# Altium PCB PCB_ECG_Amplifier.pcbdoc
Units mil, origin at the board's own origin, x right, y up, seen from the top; angles counter-clockwise.
Board outline 3315 x 2670 mil, 2 copper layers (Top Layer, Bottom Layer); 32 components, 27 nets, 96 pads, 21 vias.
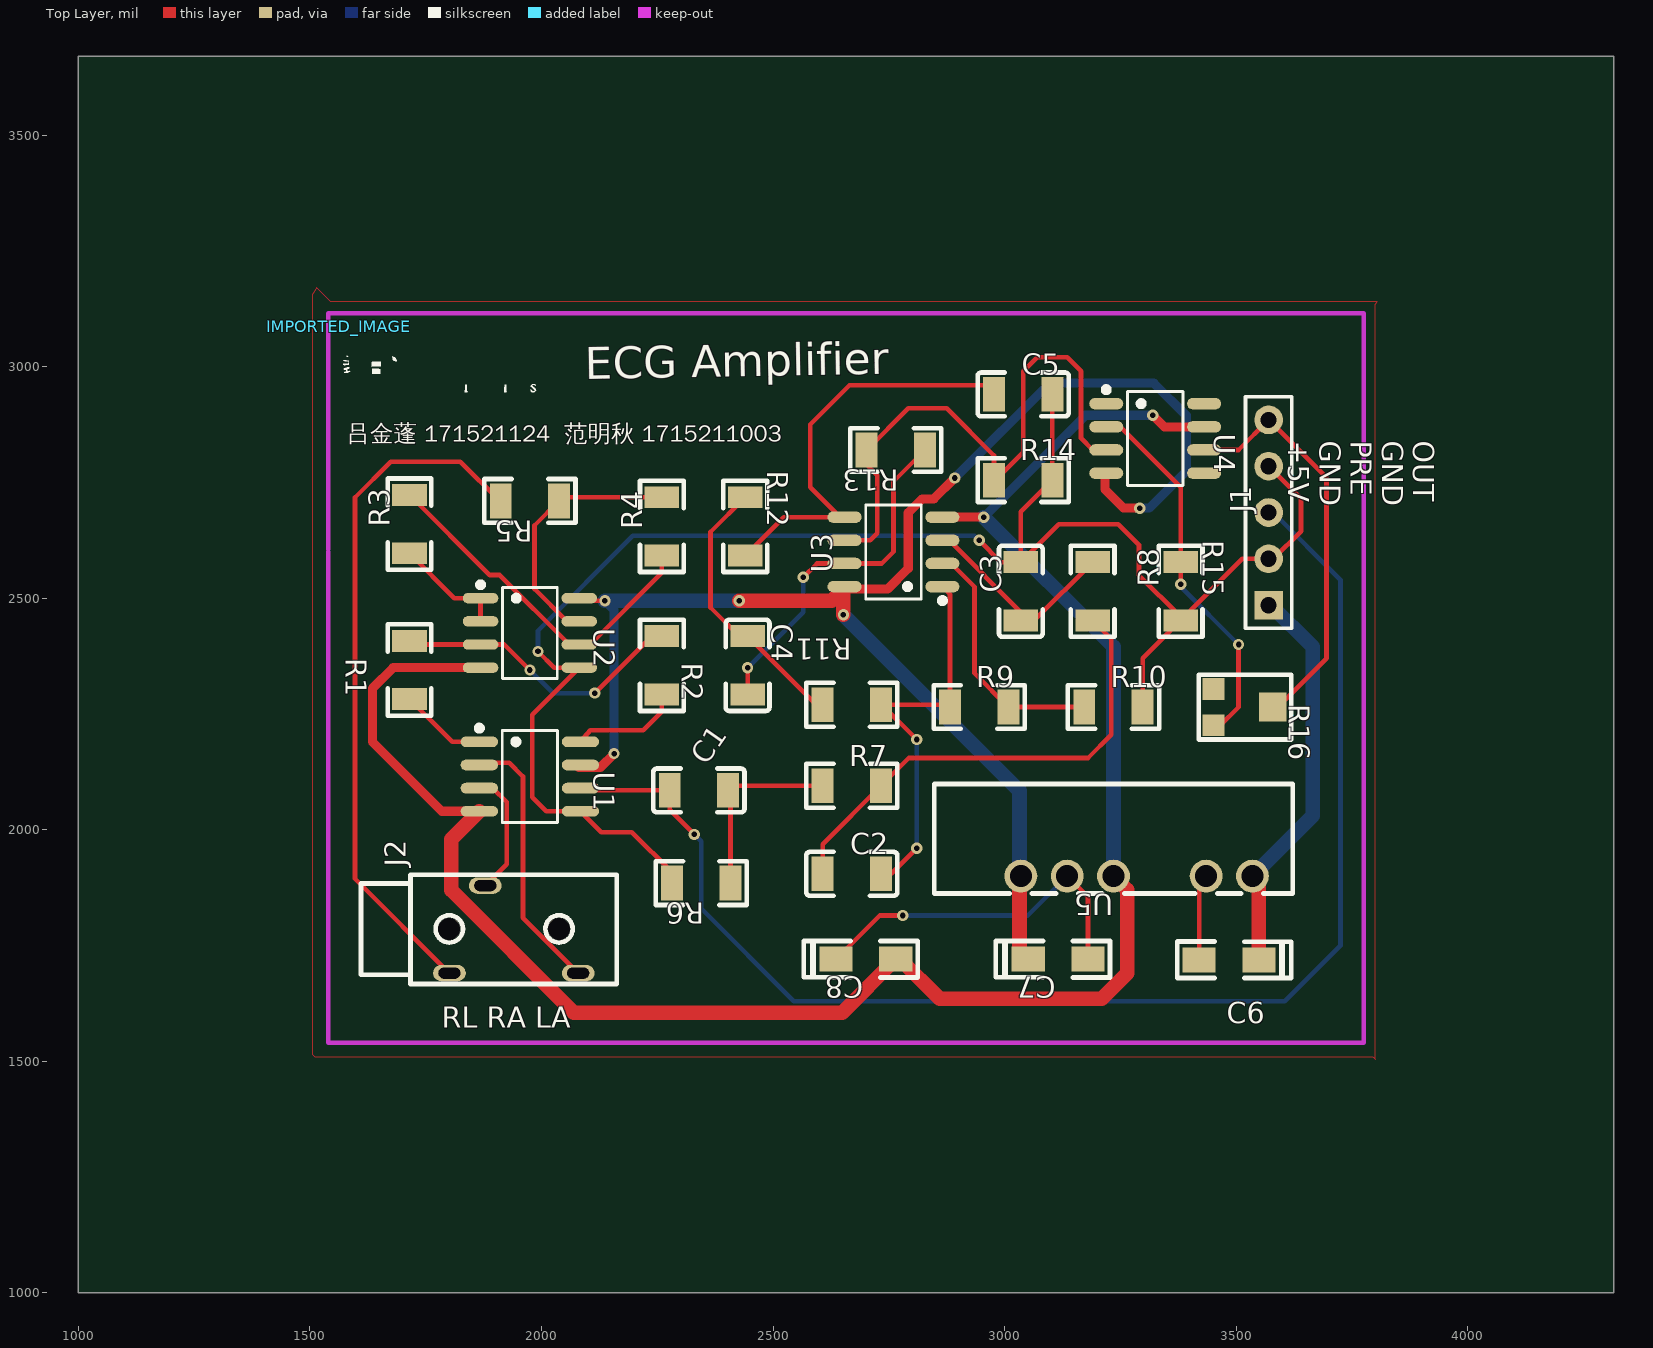
[diagram p0: Top Layer view]
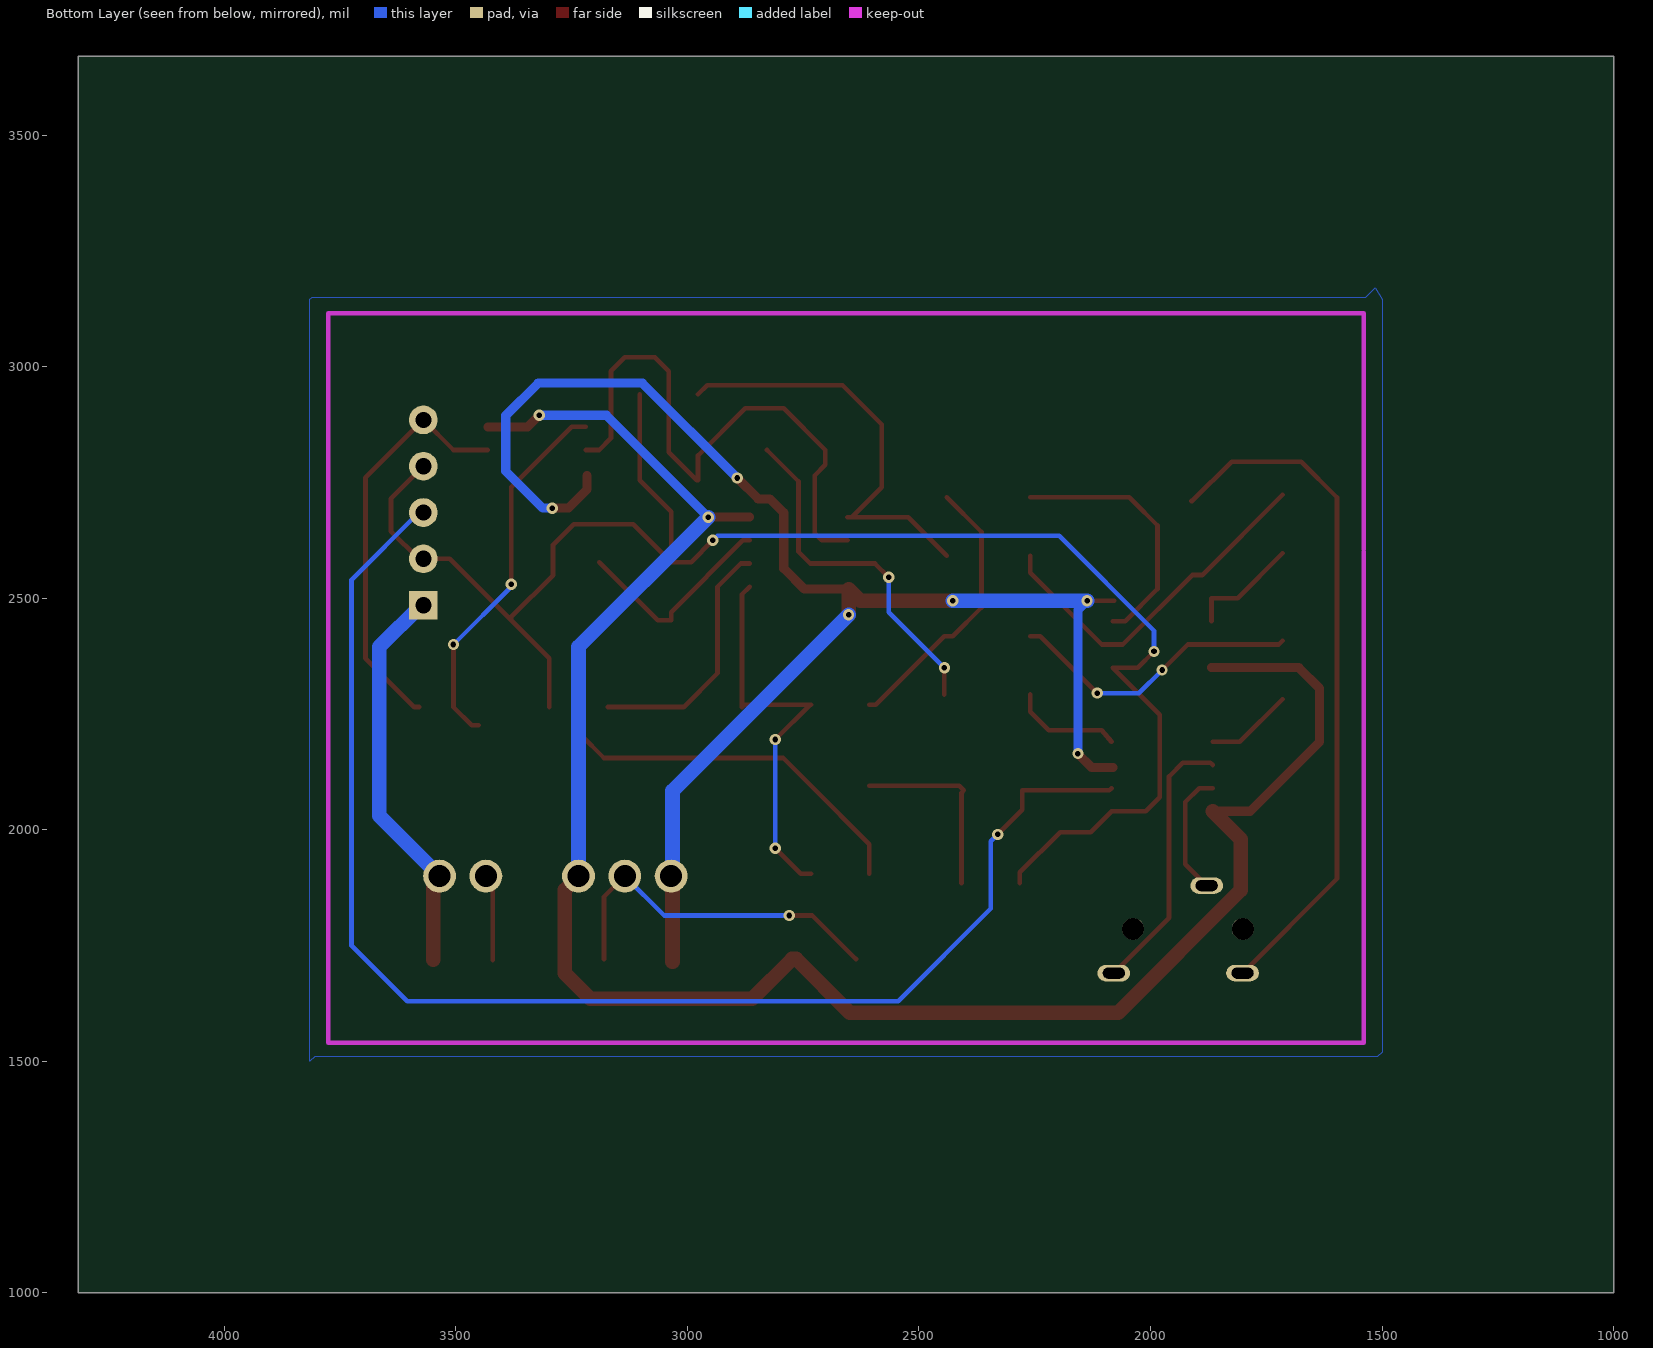
[diagram p1: Bottom Layer view, seen from below]

## Layer stack, top to bottom
Top Layer: signal copper (thickness not stored)
Dielectric: dielectric 12.6, FR-4, Dk 4.8
Bottom Layer: signal copper (thickness not stored)

## Board outline
4315,1000 1000,1000 1000,3670 4315,3670

## Components (designator, comment, footprint, x,y, rotation, side; value= is the part's Value field where it differs from the comment)
C1 "1u" C1206 2340,2085 r0 top
C2 "1u" C1206 2670,1905 r0 top
C3 "1u" C1206 3035,2515 r90 top
C4 "1u" C1206 2445,2355 r270 top
C5 "1u" C1206 3040,2940 r0 top
C6 "4.7u" CASE-A_3216 3480,1720 r0 top
C7 "1u" CASE-A_3216 3120,1720 r180 top
C8 "1u" CASE-A_3216 2705,1720 r180 top
IMPORTED_IMAGE "IMPORTED_IMAGE" IMPORTED_IMAGE 1562.31,3086.02 r0 top
J1 "HDR-M-2.54_1x5" HDR-M-2.54_1X5 3570,2685 r90 top
J2 "Black headphone jack" AUDIO-PJ320 1940,1785 r90 top
R1 "1k" R1206 1715,2345 r270 top
R2 "1k" R1206 2260,2355 r270 top
R3 "10k" R1206 1715,2660 r90 top
R4 "390k" R1206 2260,2655 r90 top
R5 "390k" R1206 1975,2710 r180 top
R6 "3M" R1206 2345,1885 r180 top
R7 "1.6k" R1206 2670,2095 r0 top
R8 "1.6k" R1206 3190,2515 r90 top
R9 "1k" R1206 2945,2265 r0 top
R10 "1k" R1206 3235,2265 r0 top
R11 "1.6k" R1206 2670,2270 r180 top
R12 "1.6k" R1206 2440,2655 r270 top
R13 "1k" R1206 2765,2820 r180 top
R14 "1k" R1206 3040,2755 r0 top
R15 "1k" R1206 3380,2515 r270 top
R16 "15K" RES-ADJ-SMD_VG039NCHXTB153 3515,2265 r270 top
U1 "INA128UA/2K5" SOIC-8_L4.9-W3.9-P1.27-LS6.0-BL 1975,2115 r270 top
U2 "OPA2131UA/2K5" SOIC-8_L5.0-W4.0-P1.27-LS6.0-BL 1975,2425 r270 top
U3 "LM358" SOP-8_L4.9-W3.9-P1.27-LS6.0-BL 2760,2600 r90 top
U4 "OP07D" SOP-8_L4.9-W3.9-P1.27-LS6.0-BL 3325,2845 r270 top
U5 "A0509S-1WR3" PWRM-TH_A05XXS-1WR3 3285,1900 r180 top

## Footprints (in the part's own frame and the unit in brackets; to place one, negate y for a bottom-side part, rotate by r counter-clockwise, add the part's x,y. Pads: shape width x height; smd on the part's side, far side on the other; paste and mask are expansions set on the pad)
AUDIO-PJ320 [mm]
  round 1.2 hole 1.2: 0(0.025,3.538) 0(0.025,-2.481)
  oval 0.9x1.8 hole 0.6 slot 1.2 at 90 deg: 2(2.4,1.556) 3(-2.397,3.523) 4(-2.4,-3.538)
  silkscreen extent -3,-5.64 3,8.37
C1206 [mm]
  rect 1.2x1.9 smd: 1(-1.6,0) 2(1.6,0)
  silkscreen extent -2.5,-1.2 2.5,1.2
CASE-A_3216 [mil]
  rect 71.5x53.5 smd: 1(69,-1) 2(-60,-1)
  silkscreen extent -107,-40 139,39
HDR-M-2.54_1X5 [mil]
  rect 62x62 hole 35: 1(-200,0)
  round 62 hole 35: 2(-100,0) 3(0,0) 4(100,0) 5(200,0)
  silkscreen extent -250,-50 250,50
IMPORTED_IMAGE [mil]
  silkscreen extent 9,-141 426,-63
PWRM-TH_A05XXS-1WR3 [mm]
  round 1.8 hole 1.2: 1(-6.35,0) 2(-3.81,0) 4(1.27,0) 5(3.81,0) 6(6.35,0)
  silkscreen extent -8.56,-5.05 11.1,0.95
R1206 [mm]
  rect 1.2x1.9 smd: 1(-1.6,0) 2(1.6,0)
  silkscreen extent -2.5,-1.2 2.5,1.2
RES-ADJ-SMD_VG039NCHXTB153 [mm]
  rect 1.2x1.2 smd: 1(-1,-1.625) 3(1,-1.625)
  rect 1.6x1.5 smd: 2(0,1.625)
  silkscreen extent -1.78,-2.44 1.78,2.64
SOIC-8_L4.9-W3.9-P1.27-LS6.0-BL [mm]
  oval 0.588x2.045 smd: 1(-1.905,-2.773) 2(-0.635,-2.773) 3(0.635,-2.773) 4(1.905,-2.773) 5(1.905,2.773) 6(0.635,2.773) 7(-0.635,2.773) 8(-1.905,2.773)
  silkscreen extent -2.8,-2.92 2.53,1.52
SOIC-8_L5.0-W4.0-P1.27-LS6.0-BL [mil]
  oval 22.38x76.78 smd: 1(-75,-106.5) 2(-25,-106.5) 3(25,-106.5) 4(75,-106.5) 5(75,106.5) 6(25,106.5) 7(-25,106.5) 8(-75,106.5)
  silkscreen extent -110,-112 98,59
SOP-8_L4.9-W3.9-P1.27-LS6.0-BL [mm]
  oval 0.63x1.865 smd: 1(-1.905,-2.682) 2(-0.635,-2.682) 3(0.635,-2.682) 4(1.905,-2.682) 5(1.905,2.682) 6(0.635,2.682) 7(-0.635,2.682) 8(-1.905,2.682)
  silkscreen extent -2.82,-2.83 2.58,1.52

## Via types
v1: diameter 24.41, hole 12, Top Layer to Bottom Layer, 16 vias
v2: diameter 24.02, hole 12.01, Top Layer to Bottom Layer, 5 vias

## Nets (pads, with @x,y where several pads share a name; then routed paths per layer and width w, separated by ;. In a path a pad name is that pad's centre, name@x,y a point inside that pad or via, vN(x,y) a via of type N, cw(c..) or ccw(c..) an arc to the next point about the centre after c; other vN are vias at no path point)
+5V: C6.1 J1.1 U5.1 | length 867.9
  Top Layer w31.5: U5.1 3549,1886 C6.1
  Bottom Layer w31.5: U5.1 3665,2030 3665,2395 3575,2485 J1.1
C1_2: C1.2 R6.1 R7.1 | length 410.2
  Top Layer w10: R6.1 2407.99,2080.01 C1.2 2413,2095 R7.1
C2_1: C2.1 R7.2 R8.1 | length 1048.3
  Top Layer w10: C2.1 2607.01,1969.02 R7.2 2793,2155 3180,2155 3230,2205 3230,2412 R8.1
C4_1: C4.1 R11.2 R12.1 | length 598.1
  Top Layer w10: R12.1 2365,2642.99 2365,2480 2427.01,2417.99 C4.1 2592.99,2270 R11.2
GND: C3.2 C5.2 J1.2 J1.4 R6.2 R10.2 R14.2 R15.2 U1.5 U2.5 | length 3641.6
  Top Layer w10: v1(1992.5,2385) 2027.5,2350 U2.5 1980,2248.5 1980,2070 2010,2040 U1.5 2129.15,1995 2195,1995 2282.01,1907.99 R6.2 ; v1(2945,2625) 2992,2578 C3.2 ; C5.2 R14.2 3035,2687.01 C3.2 ; R10.2 3297.99,2369.99 R15.2 ; J1.4 3640,2715 3640,2645 3580,2585 J1.2 3513,2585 R15.2 ; C3.2 3117,2660 3245,2660 3290,2615 3290,2550 3380,2460 R15.2
  Bottom Layer w10: v1(1992.5,2385) 1992.5,2430 2197.5,2635 2935,2635 v1(2945,2625)
LA: J2.4 U1.2 | length 582.6
  Top Layer w10: U1.2 1870.85,2145 1930,2145 1960,2115 1960,1809.81 J2.4
OUTPUT: J1.5 R16.2 U4.6 | length 892.6
  Top Layer w10: U4.6 3505,2820 J1.5 3695,2760 3695,2370 3590,2265 R16.2
PREAMP: C1.1 J1.3 U1.6 | length 2995.7
  Top Layer w10: U1.6 2089.15,2085 C1.1 2277.01,2042.99 v1(2330,1990)
  Bottom Layer w10: v1(2330,1990) 2345,1975 2345,1830 2545,1630 3605,1630 3725,1750 3725,2540 3580,2685 J1.3
RA: J2.2 U1.3 | length 271.2
  Top Layer w10: U1.3 1895,2090 1925,2060 1925,1925.77 J2.2
RL: J2.3 R5.2 | length 1493.1
  Top Layer w10: J2.3 1597.5,1894.43 1597.5,2717.5 1675,2795 1825,2795 1910,2710 R5.2
U1_1: R1.2 U1.1 | length 189
  Top Layer w10: R1.2 1807,2190 U1.1
U1_8: R2.2 U1.8 | length 241.1
  Top Layer w10: U1.8 2105,2215 2220,2215 2260,2255 R2.2
U2_1: R3.1 U2.1 U2.2 | length 243.7
  Top Layer w10: R3.1 1812,2500 U2.1 U2.2
U2_3: R1.1 R2.1 U2.3 | length 642.7
  Top Layer w10: R1.1 1722.99,2400 U2.3 1920,2400 v2(1975,2345) ; v2(2115,2295) 2237.99,2417.99 R2.1
  Bottom Layer w10: v2(1975,2345) 2025,2295 v2(2115,2295)
U2_6: R3.2 R4.1 U2.6 | length 780
  Top Layer w10: R3.2 1888,2550 1910,2550 2060,2400 U2.6 2105,2400 2260,2555 R4.1
U2_7: R4.2 R5.1 U2.7 | length 562.8
  Top Layer w10: U2.7 2055,2450 1985,2520 1985,2657 R5.1 2045.98,2717.99 R4.2
U3_1: C2.2 R9.1 R11.1 U3.1 | length 860.7
  Top Layer w10: C2.2 2755,1905 v1(2810,1960) ; v1(2810,2195) 2735,2270 R11.1 2877.01,2270 R9.1 2882.01,2508.6 U3.1
  Bottom Layer w10: v1(2810,1960) v1(2810,2195)
U3_2: R9.2 R10.1 U3.2 | length 544.4
  Top Layer w10: U3.2 2885,2575 2935,2525 2935,2338 R9.2 R10.1
U3_3: C3.1 R8.2 U3.3 | length 458.8
  Top Layer w10: U3.3 2880,2625 3035,2470 C3.1 3064.02,2452.01 R8.2
U3_5: C5.1 R12.2 U3.5 | length 925.6
  Top Layer w10: R12.2 2523,2675 U3.5 2645,2675 2580,2740 2580,2875 2665,2960 2957.01,2960 C5.1
U3_7: C4.2 R13.1 U3.7 | length 768.6
  Top Layer w10: C4.2 v1(2445,2350) ; v1(2565,2545) 2595,2575 U3.7 2735,2575 2760,2600 2760,2752 R13.1
  Bottom Layer w10: v1(2445,2350) 2565,2470 v1(2565,2545)
U4_2: R15.1 R16.3 U4.2 | length 811.5
  Top Layer w10: U4.2 3250,2870 3380,2740 R15.1 v1(3380,2530) ; R16.3 3465.63,2225.63 3505,2265 v1(3505,2400)
  Bottom Layer w10: v1(3380,2530) 3380,2525 v1(3505,2400)
U4_3: R13.2 R14.1 U3.6 U4.3 | length 1296.3
  Top Layer w10: U3.6 2710,2625 2725,2640 2725,2765 2702.01,2787.99 R13.2 2792,2910 2875,2910 2977,2808 R14.1 2980,2755 3040,2815 3040,2990 3070,3020 3135,3020 3165,2990 3165,2845 3190,2820 U4.3
U5_2: C6.2 U5.2 | length 187.2
  Top Layer w10: C6.2 3420,1885 U5.2
U5_5: C7.2 C8.1 U5.5 | length 770.8
  Top Layer w10: C8.1 2730,1815 v2(2780,1815) ; U5.5 3180,1855 C7.2
  Bottom Layer w10: v2(2780,1815) 3050,1815 U5.5
VCC: C7.1 U1.7 U2.8 U3.8 U4.4 U5.6 | length 3370.4
  Top Layer w10: U2.8@2078.5,2494.5 v2(2137,2494.5)
  Top Layer w19.68: U1.7@2081.15,2134.5 2127,2134.5 v2(2157,2164.5) ; U3.8@2651.4,2519.5 2747,2519.5 2792,2564.5 2792,2684.5 2822,2714.5 2847,2714.5 v1(2892,2759.5) ; U4.4@3216.39,2764.5 3216.39,2735.11 3257,2694.5 v1(3292,2694.5)
  Top Layer w31.5: v1(2427,2494.5) 2626.39,2494.5 2651.39,2519.5 v1(2652,2464.5) ; C7.1@3032,1715.5 U5.6@3032,1894.5
  Bottom Layer w19.68: v2(2137,2494.5) 2157,2474.5 v2(2157,2164.5) ; v1(2892,2759.5) 3097,2964.5 3322,2964.5 3392,2894.5 3392,2774.5 3312,2694.5 v1(3292,2694.5)
  Bottom Layer w31.5: v2(2137,2494.5) v1(2427,2494.5) ; v1(2652,2464.5) 3032,2084.5 U5.6@3032,1894.5
  other v1: 3292,2694.5
VEE: C8.2 U1.4 U2.4 U3.4 U4.7 U5.4 | length 4311.4
  Top Layer w19.68: U1.4 1785,2040 1635,2190 1635,2305 1680,2350 U2.4 ; U3.4 v1(2955,2675) ; v1(3320,2895) 3345,2870 U4.7
  Top Layer w31.5: U1.4 1805,1979.2 1805,1870 2070,1605 2649,1605 C8.2 2774,1721 2860,1635 3210,1635 3265,1690 3265,1870 U5.4
  Bottom Layer w19.68: v1(2955,2675) 3175,2895 v1(3320,2895)
  Bottom Layer w31.5: v1(2955,2675) 3235,2395 U5.4
pads on no net: J2.0 R16.1 U4.1 U4.5 U4.8

## Polygon pours and split planes (outlines as drawn)
GND on Top Layer (solid): 1505,3155 1505,1515 1510,1510 3795,1510 3800,1505 3800,3135 3805,3140 1545,3140 1515,3170
GND on Bottom Layer (solid): 1500,3145 1500,1520 1510,1510 3805,1510 3815,1500 3815,3145 3810,3150 1535,3150 1515,3170

## Silkscreen, mask and mechanical layers (free items; w line width, h text height)
Top Overlay:
  text "ECG Amplifier" at 2095,2950 h118.11 r1
  text "OUT / GND / PRE / GND / +5V" at 3612.5,2840 h45 r270
  text "吕金蓬 171521124  范明秋 1715211003" at 1580,2825 h62.99
  text "RL RA LA" at 1785,1572.5 h45